# Altium PCB ROV_PCB_PWR.PcbDoc
Units mil, origin at the board's own origin, x right, y up, seen from the top; angles counter-clockwise.
Board outline 2755.91 x 1948.72 mil, 2 copper layers (Top Layer, Bottom Layer); 27 components, 17 nets, 85 pads, 0 vias.
Unrouted connection lines stored in the file: 2.
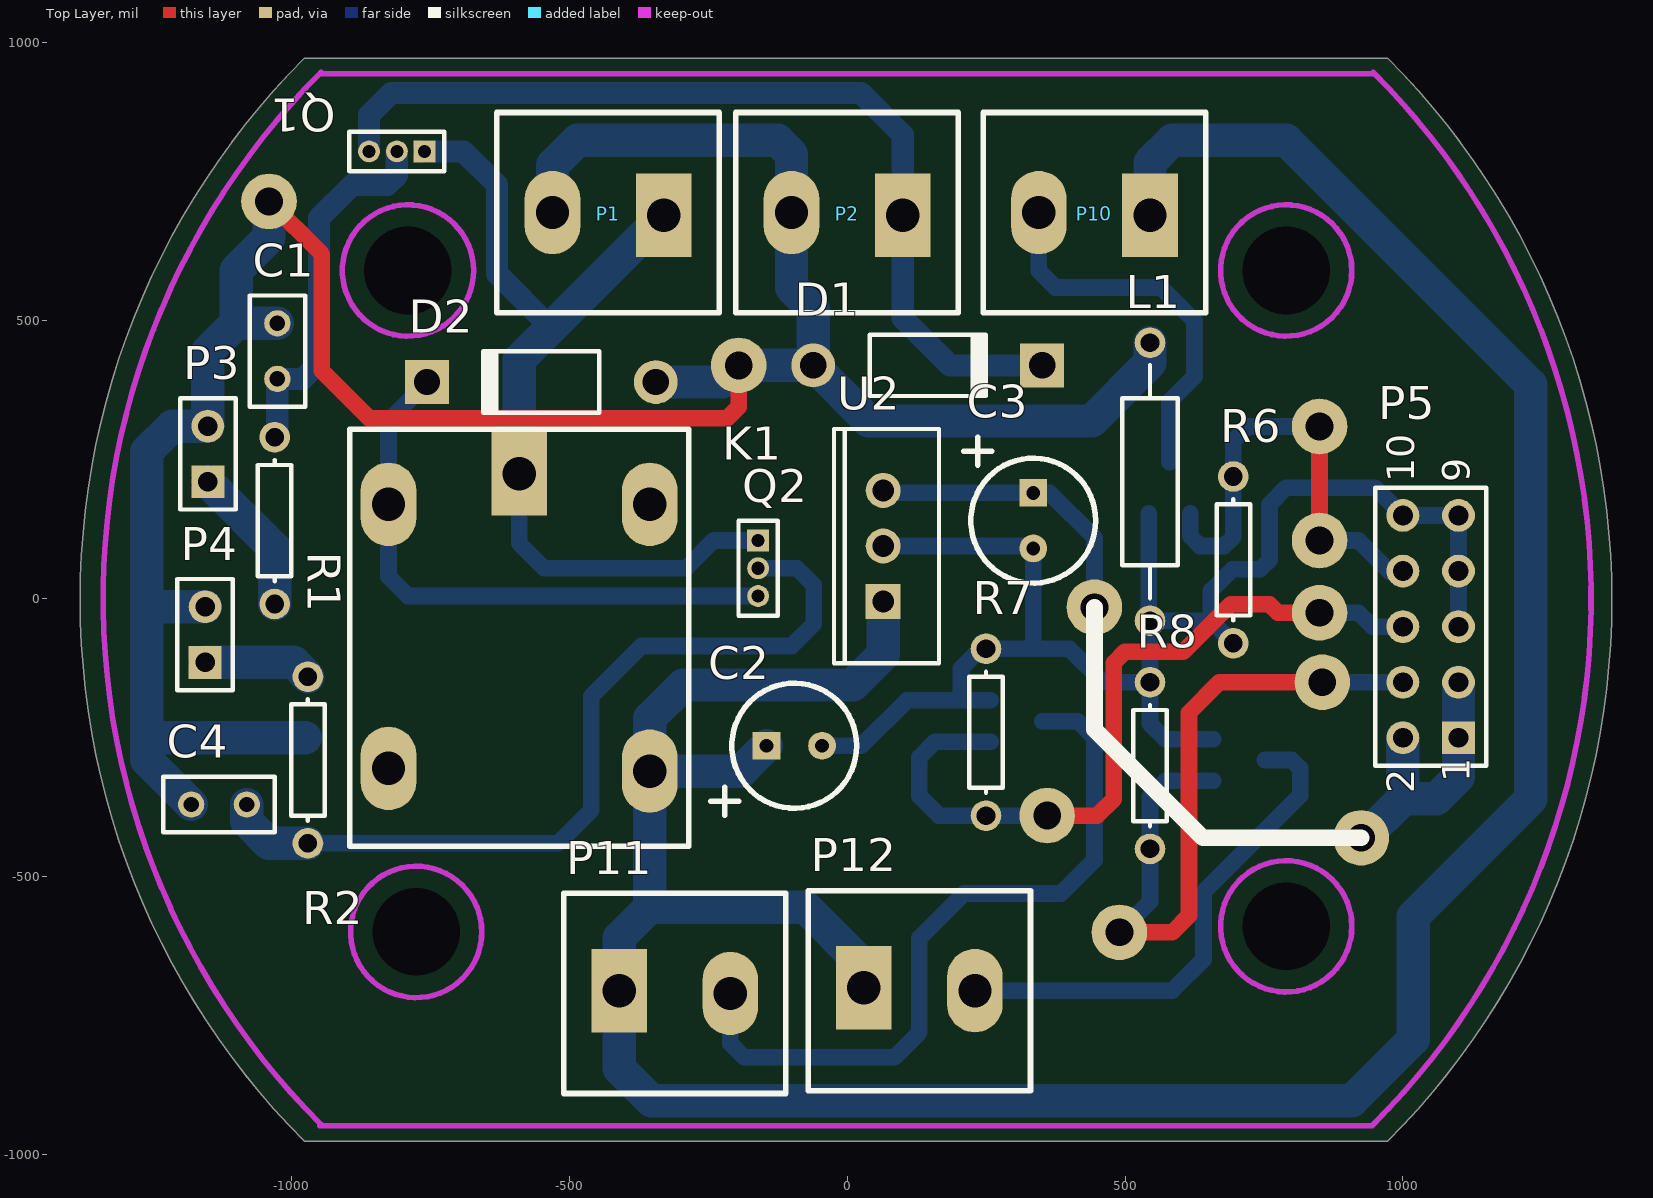
[diagram p0: Top Layer view]
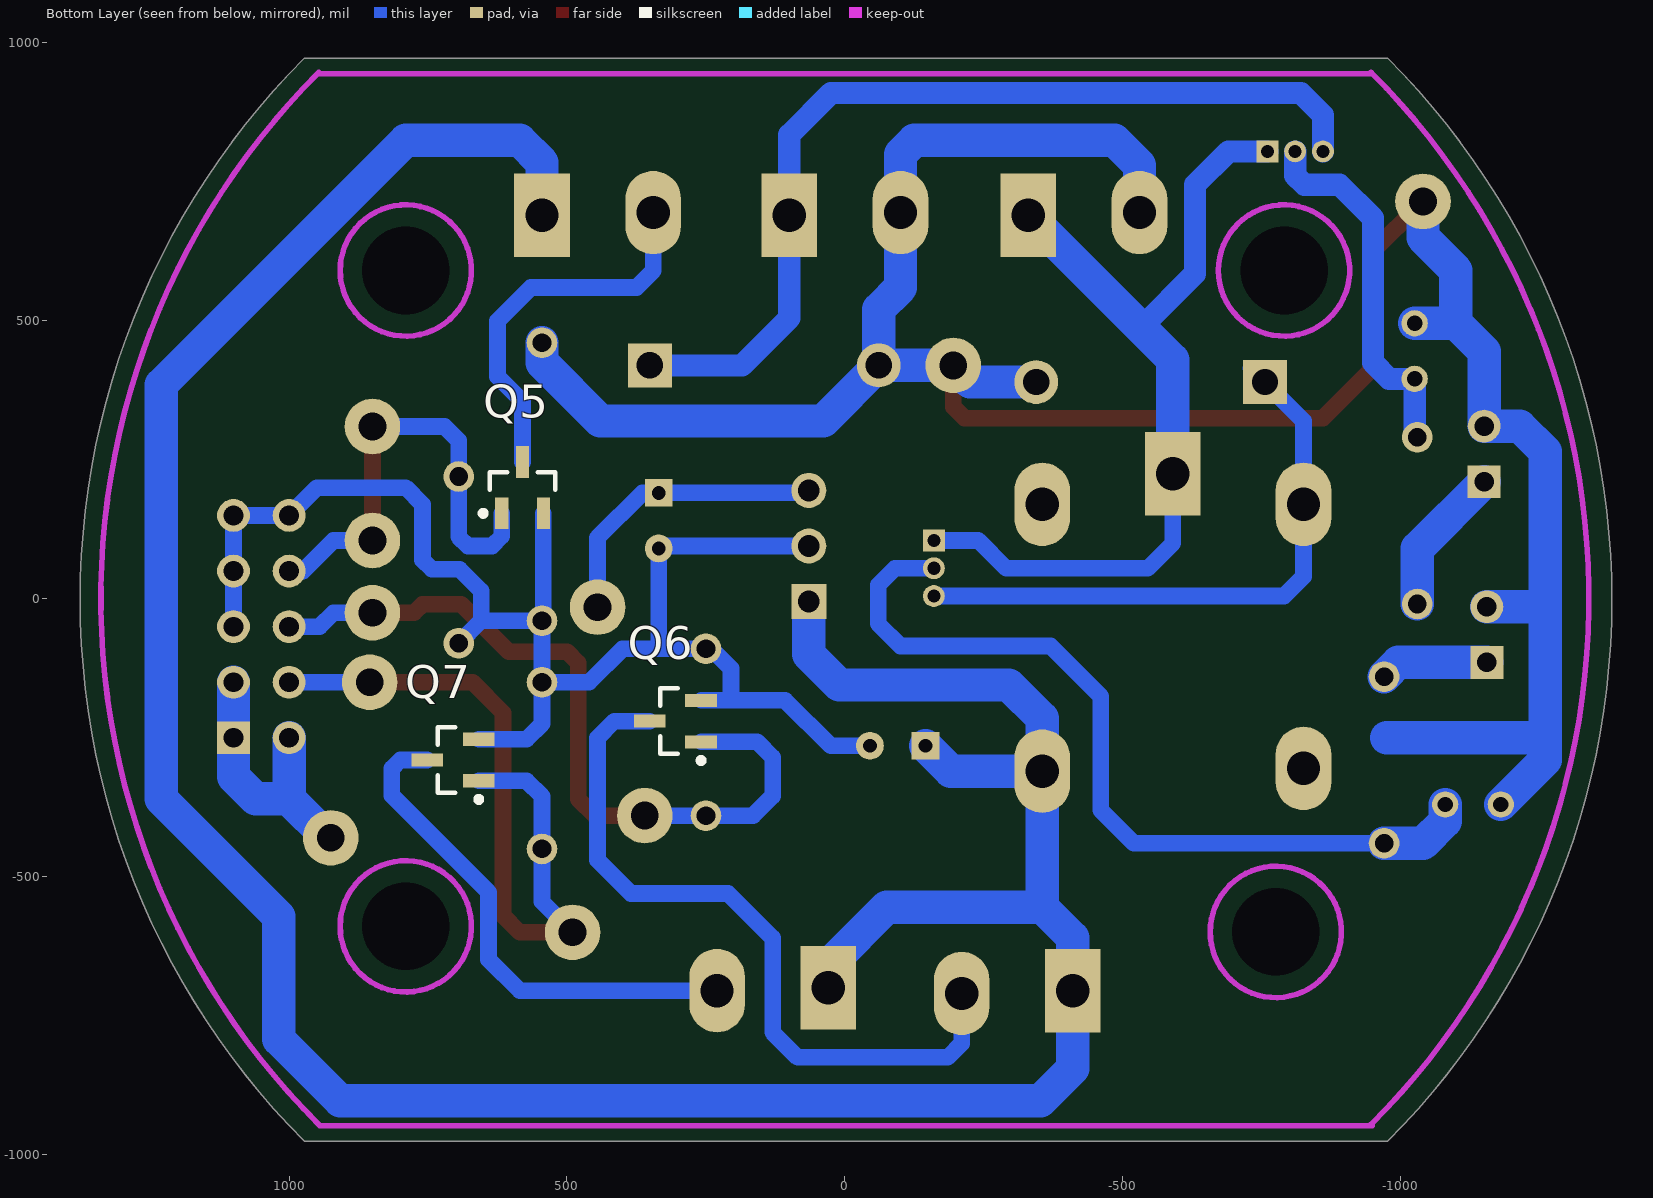
[diagram p1: Bottom Layer view, seen from below]

## Layer stack, top to bottom
Top Solder: solder mask 0.4, Solder Resist, Dk 3.5
Top Layer: signal copper 1.4
Dielectric 1: dielectric 12.6, FR-4, Dk 4.8
Bottom Layer: signal copper 1.4
Bottom Solder: solder mask 0.4, Solder Resist, Dk 3.5

## Board outline
-976.32,-975.88 972.4,-975.88 ccw(c-1.96,-1.52) 972.4,972.84 -976.32,972.84 ccw(c-1.96,-1.52)

## Design rules (kind name [scope] priority, off if disabled: settings)
Clearance [All] p1: gap=10
PolygonConnect [All] p1: connectstyle=Relief reliefconductorwidth=10 reliefentries=4 polygonreliefangle="90 Angle" airgapwidth=10
RoomDefinition ROV_PCB_PWR [InComponentClass('ROV_PCB_PWR')] p1: confinementstyle=ConfineOut formatcopy=TRUE lockcomponents=FALSE outline 1420,-919.28 11550,-919.28 11550,355.72 1420,355.72
RoutingVias [All] p1: holewidth=28 width=50 viastyle="Through Hole" minholewidth=28 minwidth=50 maxholewidth=28 maxwidth=50
SolderMaskExpansion [All] p1: expansion=4
Width [All] p1: maxlimit=80 minlimit=10 preferedwidth=40 minimp=50.000000 maximp=50.000000 favimp=50.000000
30 further rules are at their usual default settings.

## Components (designator, comment, footprint, x,y, rotation, side; value= is the part's Value field where it differs from the comment)
C1 "100n" RAD-0.1 -1025,445.72 r270 top
C2 "0.33u" ELKO200 -95,-264.28 r180 top
C3 "0.1u" ELKO200 335,140.72 r90 top
C4 "100n" RAD-0.1 -1130,-370 r0 top
D1 "1N4007" DO-41 145,420 r0 top
D2 "1N4007" DO-41 -550,390 r180 top
K1 "Elmatis br.151" REL151 -590,-70 r0 top
L1 "100u" AXIAL-0.5 545,210.72 r270 top
P1 "Battery" KLEMA -430,695 r180 top
P2 "ESC PWR relay" KLEMA 0,695 r180 top
P3 "ESC PWR SW" HDR1X2 -1150,210.72 r90 top
P4 "LOGIC PWR SW" HDR1X2 -1155,-114.28 r90 top
P5 "Header logic" HDR2X5 1100,-250 r90 top
P10 "SW1 header" KLEMA 445,695 r180 top
P11 "SW2 header" KLEMA -310,-710 r0 top
P12 "SW3 header" KLEMA 130,-705 r0 top
Q1 "PNP 2N3906" MHDR1X3 -760,805 r180 top
Q2 "PNP 2N3906" MHDR1X3 -160,105 r270 top
Q5 "TSM2306" SOT-23_M 580,200 r90 bottom
Q6 "TSM2306" SOT-23_M 305,-220 r0 bottom
Q7 "TSM2306" SOT-23_M 705,-290 r0 bottom
R1 "10k" AXIAL-0.3 -1030,140.72 r90 top
R2 "10k" AXIAL-0.3 -970,-290 r90 top
R6 "10k" AXIAL-0.3 695,70 r90 top
R7 "10k" AXIAL-0.3 250,-240 r270 top
R8 "10k" AXIAL-0.3 545,-300 r270 top
U2 "7805" TO-220-AB 65,95 r90 top

## Footprints (in the part's own frame and the unit in brackets; to place one, negate y for a bottom-side part, rotate by r counter-clockwise, add the part's x,y. Pads: shape width x height; smd on the part's side, far side on the other; paste and mask are expansions set on the pad)
AXIAL-0.3 [mm] "Axial Device, Thru-Hole; 2 Leads; 0.3 in Pin Spacing"
  round 1.4 hole 0.85: 1(-3.81,0) 2(3.81,0)
  silkscreen extent -2.77,-0.76 2.77,0.76
AXIAL-0.5 [mm] "Axial Device, Thru-Hole; 2 Leads; 0.5 in Pin Spacing"
  round 1.4 hole 0.85: 1(-6.35,0) 2(6.35,0)
  silkscreen extent -5.33,-1.27 5.33,1.27
DO-41 [mm] "Diode, Axial; Body 5.2 x 2.7 mm (LxDia. max), Lead Dia. 0.86 mm (max)"
  round 2 hole 1.2: 1(-5.23,0)
  rect 2x2 hole 1.2: 2(5.23,0)
  silkscreen extent -2.65,-1.4 2.75,1.4
ELKO200 [mil]
  rect 50x50 hole 25: 1(50,0)
  round 50 hole 25: 2(-50,0)
  silkscreen extent -112,-112 150,125
HDR1X2 [mm] "Connector; Header; 2 Position"
  rect 1.5x1.5 hole 0.9: 1(0,0)
  round 1.5 hole 0.9: 2(2.54,0)
  silkscreen extent -1.27,-1.27 3.81,1.27
HDR2X5 [mm] "Connector; Header; 5x2 Position"
  rect 1.5x1.5 hole 0.9: 1(0,0)
  round 1.5 hole 0.9: 2(0,2.54) 3(2.54,0) 4(2.54,2.54) 5(5.08,0) 6(5.08,2.54) 7(7.62,0) 8(7.62,2.54) 9(10.16,0) 10(10.16,2.54)
  silkscreen extent -1.27,-1.27 11.43,3.81
KLEMA [mil]
  rect 100x150 hole 60: 1(-100,5)
  oval 100x150 hole 60: 2(100,0)
  silkscreen extent -200,-180 200,180
MHDR1X3 [mm] "Connector; Header; 3 Position"
  rect 1x1 hole 0.6: 1(0,0)
  round 1 hole 0.6: 2(1.27,0) 3(2.54,0)
  silkscreen extent -0.9,-0.9 3.44,0.9
RAD-0.1 [mm] "Radial Cap, Thru-Hole; 2 Leads; 0.1 in Pin Spacing"
  round 1.2 hole 0.7: 1(-1.27,0) 2(1.27,0)
  silkscreen extent -2.54,-1.27 2.54,1.27
REL151 [mil]
  rect 100x150 hole 60: 1(0,295)
  oval 100x150 hole 60: 2(235,-240) 3(-235,240) 4(235,240) 5(-235,-235)
  silkscreen extent -305,-375 305,375
SOT-23_M [mm] "SOT23, 3-Leads, Body 2.9x1.3mm, Pitch 0.95mm, Lead Span 2.5mm, IPC Low Density"
  rect 1.45x0.6 smd: 1(-1.175,0.95) 2(-1.175,-0.95) 3(1.175,0)
  silkscreen extent -1.3,-1.5 0.7,1.93, body extent -0.7,-1.5 0.7,1.5, height 1.1
TO-220-AB [mm] "TO, Thru-Hole, Vertical, Heatsink Mounted; 3 In-Line Leads; Pitch 2.54 mm"
  rect 1.6x1.6 hole 1: 1(-2.54,0)
  round 1.6 hole 1: 2(0,0) 3(2.54,0)
  silkscreen extent -5.35,-2.55 5.35,2.25

## Part data
C1 C4: library part Cap, "Capacitor"
C2 C3: library part "Cap Pol1", "Polarized Capacitor (Radial)"
D1 D2: library part "Diode 1N4007", "1 Amp General Purpose Rectifier"
K1: library part Relay-SPST, "Single-Pole Single-Throw Relay"
L1: library part Inductor, "Inductor"
P1 P2 P3 P4 P10 P11 P12: library part "Header 2", "Header, 2-Pin"
P5: library part "Header 5X2", "Header, 5-Pin, Dual row"
Q1 Q2: library part PNP, "PNP Bipolar Transistor"
Q5 Q6 Q7: library part MOSFET-N
R1 R2 R6 R7 R8: library part Res1, "Resistor"
U2: library part µA7805CKC, "Positive-Voltage Regulator"

## Free pads (board coordinates)
  round 50 hole 157.48: 0(-790,590.72) 0(-775.26,-599.28) 0(790,-589.28) 0(790,590.72)
  round 100 hole 50: 2(445,-15) 3(490,-600) 4(855,-150) 5(360,-390) 5(850,-25) 6(850,105) 7(850,310) 8(925,-430) 9(-195,420) 10(-1040,715)

## Nets (pads, with @x,y where several pads share a name; then routed paths per layer and width w, separated by ;. In a path a pad name is that pad's centre, name@x,y a point inside that pad or via, vN(x,y) a via of type N, cw(c..) or ccw(c..) an arc to the next point about the centre after c; other vN are vias at no path point)
5V: C3.1 P5.1 P5.2 P5.3 pad.2 pad.8 U2.3 | length 1040.8
  Bottom Layer w30: U2.3 69.28,190.72 C3.1 364.28,190.72 445,110 pad.2
  Bottom Layer w60: pad.8 930,-430 1000,-360 ; P5.2 1000,-360 ; P5.3 P5.1 1100,-320 1060,-360 1000,-360
DGND: C2.2 C3.2 L1.2 P5.5 P5.7 P5.9 P5.10 Q5.2 Q6.2 Q7.2 R6.1 R7.1 R8.1 U2.2 | length 2756.4
  Bottom Layer w30: C2.2 25.72,-264.28 107.4,-182.6 205,-182.6 ; U2.2 330.72,95 C3.2 335,-85 330,-90 ; Q6.2 205,-182.6 ; Q5.2 542.6,-36.88 L1.2 ; Q7.2 572.6,-252.6 545,-225 R8.1 ; R6.1 654.28,-39.28 ; P5.5 P5.7 P5.9 P5.10 950,200 790,200 760,170 760,70 743.21,53.21 693.21,53.21 654.28,14.28 654.28,-39.28 ; 205,-182.6 205,-125 240,-90 330,-90 ; 330,-90 400,-90 460,-150 R8.1 ; R8.1 L1.2 ; L1.2 654.28,-39.28
GND: C1.1 C4.1 D1.1 D2.1 K1.4 L1.1 P1.2 P2.2 P3.2 P4.2 pad.9 pad.10 | length 4812.1
  Top Layer w30: pad.10 -945,620 -945,410 -860,325 -215,325 -195,345 pad.9
  Bottom Layer w60: -1255.72,-14.28 P4.2 ; C4.1 -1260,-290 -1260,-250 ; pad.10 -1040,650 -1099.28,590.72 -1099.28,495.72 ; C1.1 -1099.28,495.72 ; -975,-250 -1260,-250 ; P1.2 -530,780 -485,825 -125,825 -100,800 P2.2 ; D2.1 -225,390 pad.9 D1.1 ; P2.2@-100,625 -100,560 -60.91,520.91 D1.1 ; L1.1 545,425 440,320 39.09,320 D1.1 ; -1260,-250 -1260,265 -1214.28,310.72 P3.2 -1150,445 -1099.28,495.72
NetC1_2: C1.2 Q1.2 R1.2 | length 662.2
  Bottom Layer w40: R1.2@-1025,295.72 C1.2 -979.28,395.72 -950,425 -950,685 -890,745 -826.62,745 -810,761.62 Q1.2
NetC4_2: C4.2 Q2.2 R2.1 | length 1532.7
  Bottom Layer w30: R2.1 -520,-440 -460,-380 -460,-175 -370,-85 -100,-85 -60,-45 -60,25 -90,55 Q2.2
  Bottom Layer w60: C4.2 -1080,-400 -1040,-440 R2.1
NetD1_2: D1.2 P2.1 Q1.3 | length 1688.7
  Bottom Layer w40: Q1.3 -860,870 -820,910 25,910 100,835 P2.1 100,505 185,420 D1.2
NetD2_2: D2.2 K1.3 Q2.3 | length 1093.8
  Bottom Layer w30: D2.2@-730,415 -825,320 K1.3 -825,40 -790,5 Q2.3
NetP3_1: P3.1 R1.1 | length 269.7
  Bottom Layer w60: P3.1 -1030,90.72 R1.1
NetP4_1: P4.1 R2.2 | length 195.7
  Bottom Layer w60: P4.1 -995.72,-114.28 R2.2
NetP5_4: P5.4 pad.3 pad.4 Q7.1 R8.2 | length 1303.2
  Top Layer w30: pad.3 585,-600 615,-570 615,-205 670,-150 pad.4
  Bottom Layer w30: pad.3 545,-545 R8.2 545,-355 572.6,-327.4 Q7.1 ; pad.4 P5.4
NetP5_6: P5.6 pad.5 Q6.1 R7.2 | length 1412.2
  Top Layer w30: pad.5@360,-390 450,-390 480,-360 480,-115 500,-95 605,-95 690,-10 760,-10 775,-25 pad.5@850,-25
  Bottom Layer w30: Q6.1 157.6,-257.4 130,-285 130,-355 165,-390 R7.2 pad.5@360,-390 ; pad.5@850,-25 920,-25 945,-50 P5.6
NetP5_8: P5.8 pad.6 pad.7 Q5.1 R6.2 | length 849.5
  Top Layer w30: pad.6 pad.7
  Bottom Layer w30: Q5.1 617.4,112.6 635,95 678.43,95 695,111.57 R6.2 695,285 720,310 pad.7 ; pad.6 920,105 975,50 P5.8
NetP10_2: P10.2 Q5.3 | length 694.7
  Bottom Layer w30: P10.2 345,590 375,560 565,560 625,500 625,400 580,355 Q5.3
NetP11_2: P11.2 Q6.3 | length 1273.2
  Bottom Layer w30: P11.2@-210,-765 -210,-800 -185,-825 85,-825 130,-780 130,-610 210,-530 385,-530 445,-470 445,-250 415,-220 Q6.3
NetP12_2: P12.2 Q7.3 | length 920.2
  Bottom Layer w30: P12.2 585,-705 641.17,-648.83 641.17,-527.63 815,-353.8 815,-305 800,-290 Q7.3
VBATT: K1.1 P1.1 Q1.1 Q2.1 | length 1616.2
  Bottom Layer w30: K1.1 -590,100 -545,55 -290,55 -240,105 Q2.1
  Bottom Layer w40: Q1.1 -690,805 -630,745 -630,585 -535,490
  Bottom Layer w60: K1.1 -590,430 P1.1
VREL: C2.1 K1.2 P10.1 P11.1 P12.1 U2.1 | length 5653.1
  Bottom Layer w60: C2.1 -190.72,-310 K1.2 ; P12.1@25,-700 25,-655 -75,-555 -355,-555 ; U2.1 65,-100 10,-155 -295,-155 -355,-215 K1.2 ; P10.1 545,785 585,825 790,825 1230,385 1230,-360 1018.58,-571.42 1018.58,-792.53 908.07,-903.04 -351.96,-903.04 -410,-845 P11.1 -410,-610 -355,-555 ; -355,-555 K1.2
pads on no net: K1.5

## Keep-outs
Keep-Out Layer:
  circle w10: c-790,590.72 r118.11
  circle w10: c790,590.72 r118.11
  circle w10: c-775.26,-599.28 r118.11
  circle w10: c790,-589.28 r118.11
  lines w10: -948.52,-948.04 944.52,-948.04 ; -948.52,945 944.52,945 ; -946.52,-945.8 cw(c0,0.72) -946.52,947.24 ; 946.52,-945.8 ccw(c0,0.72) 946.52,947.24

## Silkscreen, mask and mechanical layers (free items; w line width, h text height)
Top Overlay:
  lines w30: 445,-15 445,-235 640,-430 925,-430
Mechanical 1:
  lines w10: -976.32,-975.88 972.4,-975.88 ; -976.32,972.84 972.4,972.84 ; -974.36,-973.64 cw(c0,0.72) -974.36,975.08 ; 974.36,-973.64 ccw(c0,0.72) 974.36,975.08

## Dimensions
-976.32,972.84 to 972.4,972.84 on Mechanical 2
0,0.72 to -1635.26,195.72 on Mechanical 2

## Text inside footprints (layer, text, board x,y; h text height)
P5: Top Overlay "10" at 1020,210 h50 r90; Top Overlay "9" at 1120,210 h50 r90; Top Overlay "1" at 1120,-330 h50 r90; Top Overlay "2" at 1020,-350 h50 r90